# EAGLE board heehaw (EAGLE 9.0.1)
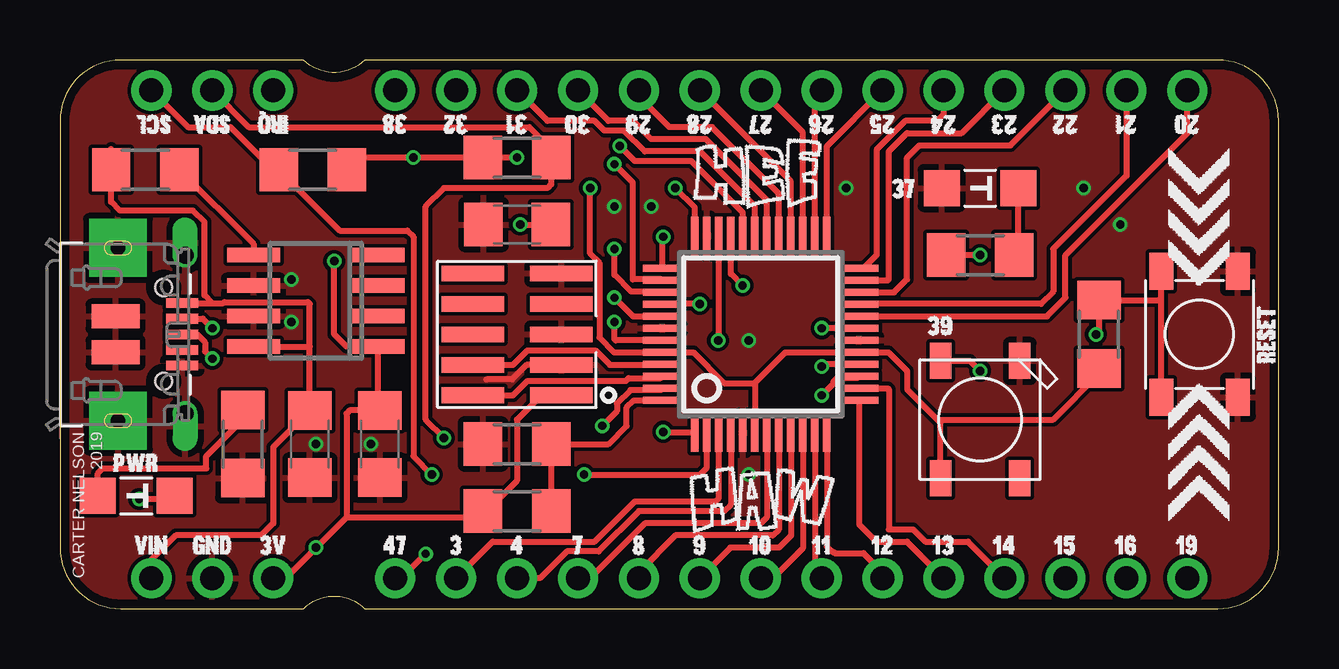
[diagram p0: board, top side]
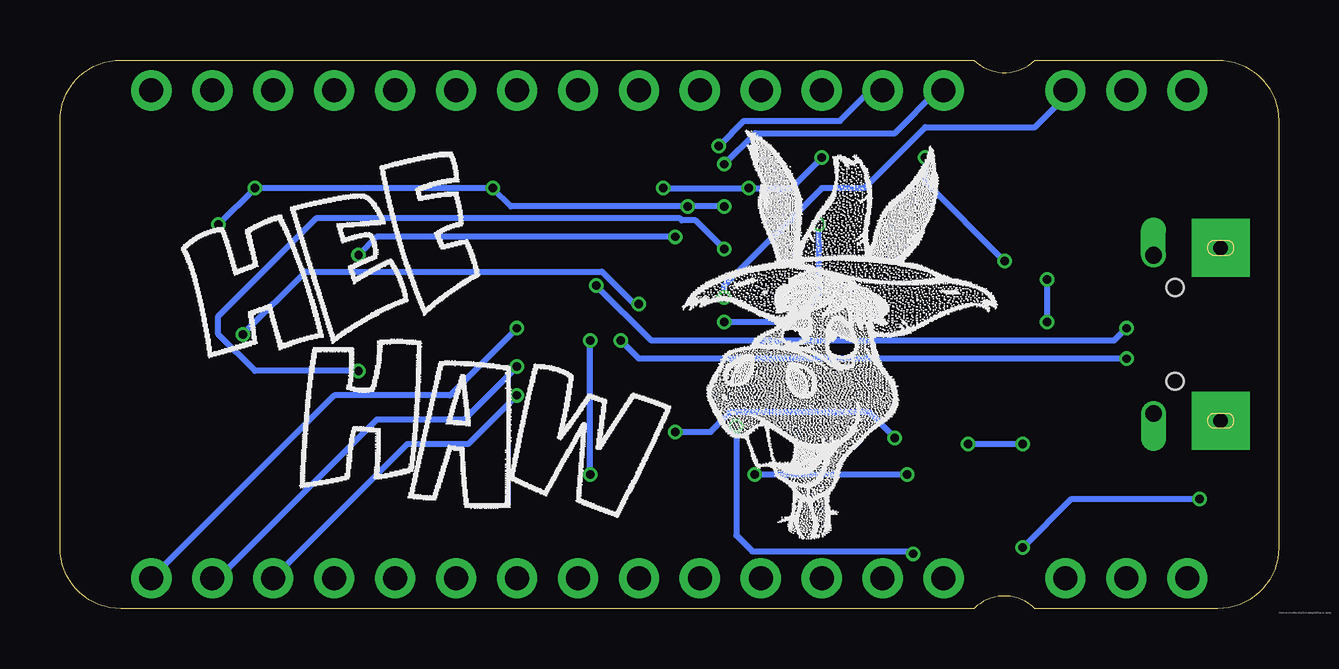
[diagram p1: board, bottom side, seen from below]

Size 50.8 x 22.86 mm. Coordinates in mm from the lower left corner, seen from the top.
Outline: 0,20.32 0,2.54 arc90 2.54,0 10.16,0 arc-90 12.7,0 48.26,0 arc90 50.8,2.54 50.8,20.32 arc90 48.26,22.86 12.7,22.86 arc-90 10.16,22.86 2.54,22.86 arc90 0,20.32
Copper layers (1*16): Top 0.035559375mm / dielectric 1.6mm / Bottom 0.035559375mm
Design rules "oshpark-2layer": minimum track width 6mil, minimum drill 10mil, track to track 6mil, track to pad 6mil, pad to pad 6mil, via to via 6mil, smd to smd 6mil, copper to edge 15mil, drill to drill 6mil, minimum pad ring 5mil, minimum via ring 5mil, stop-mask expansion 2.5mil, vias tented up to drill 0mil, thermal gap 10mil

## Footprints (pad centres in the part's own frame; a part is rotated, then mirrored left to right if it is on the bottom)
C1206 = smd 1.6 x 1.8: 1 -1.4,0; 2 1.4,0
LED1206 = smd 1.5 x 1.5: 1 -1.6,0; 2 1.6,0
R1206 = smd 1.6 x 1.803: 1 -1.422,0; 2 1.422,0
SO08 = smd 0.6 x 2.2: 1 -1.905,-2.6; 2 -0.635,-2.6; 3 0.635,-2.6; 4 1.905,-2.6; 5 1.905,2.6; 6 0.635,2.6; 7 -0.635,2.6; 8 -1.905,2.6
TQFP48_7MM = smd 0.3 x 1.6: 1 -2.75,-4.1; 2 -2.25,-4.1; 3 -1.75,-4.1; 4 -1.25,-4.1; 5 -0.75,-4.1; 6 -0.25,-4.1; 7 0.25,-4.1; 8 0.75,-4.1; 9 1.25,-4.1; 10 1.75,-4.1; 11 2.25,-4.1; 12 2.75,-4.1; 25 2.75,4.1; 26 2.25,4.1; 27 1.75,4.1; 28 1.25,4.1; 29 0.75,4.1; 30 0.25,4.1; 31 -0.25,4.1; 32 -0.75,4.1; 33 -1.25,4.1; 34 -1.75,4.1; 35 -2.25,4.1; 36 -2.75,4.1 | smd 1.6 x 0.3: 13 4.1,-2.75; 14 4.1,-2.25; 15 4.1,-1.75; 16 4.1,-1.25; 17 4.1,-0.75; 18 4.1,-0.25; 19 4.1,0.25; 20 4.1,0.75; 21 4.1,1.25; 22 4.1,1.75; 23 4.1,2.25; 24 4.1,2.75; 37 -4.1,2.75; 38 -4.1,2.25; 39 -4.1,1.75; 40 -4.1,1.25; 41 -4.1,0.75; 42 -4.1,0.25; 43 -4.1,-0.25; 44 -4.1,-0.75; 45 -4.1,-1.25; 46 -4.1,-1.75; 47 -4.1,-2.25; 48 -4.1,-2.75
PTS647 = smd 1.55 x 1: 1 -2.625,1.6; 2 2.625,1.6; 3 -2.625,-1.6; 4 2.625,-1.6
PHD_1X3 = drill 1 pad 1.676: 1 0,0; 2 2.54,0; 3 5.08,0
WS2812B_5050 = smd 1.5 x 0.9: 1-VDD 2.45,-1.65; 2-DOUT 2.45,1.65; 3-GND -2.45,1.65; 4-DIN -2.45,-1.65
PHD_1X14 = drill 1 pad 1.676: 1 0,0; 2 2.54,0; 3 5.08,0; 4 7.62,0; 5 10.16,0; 6 12.7,0; 7 15.24,0; 8 17.78,0; 9 20.32,0; 10 22.86,0; 11 25.4,0; 12 27.94,0; 13 30.48,0; 14 33.02,0
SWD_MINI = smd 0.65 x 2.6: 1 -2.54,-1.85; 2 -2.54,1.85; 3 -1.27,-1.85; 4 -1.27,1.85; 5 0,-1.85; 6 0,1.85; 7 1.27,-1.85; 8 1.27,1.85; 9 2.54,-1.85; 10 2.54,1.85
USB_MICRO_B = smd 1 x 2: BASE@1 -0.75,-2; BASE@2 0.75,-2 | smd 0.4 x 1.35: D+ 0,0.775; D- -0.65,0.775; GND 1.3,0.775; ID 0.65,0.775; VBUS -1.3,0.775 | drill 0.7 offset: SPRT@1 -3.3,0.9; SPRT@2 3.3,0.9 | drill 0.6 pad 2.413 square: SPRT@3 -3.6,-1.9; SPRT@4 3.6,-1.9 | hole 0.7: -1.95,0; 1.95,0

## Placement (x,y rotation side)
C1  1uF  [C1206]  19.05,16 180 top
C2  1uF  [C1206]  10.41,6.86 270 top
C3  1uF  [C1206]  13.34,6.86 270 top
D1  LED1206  [LED1206]  38.35,17.53 0 top
D3  LED1206  [LED1206]  3.17,4.7 0 top
R1  [R1206]  19.05,18.8 180 top
R2  [R1206]  10.54,18.29 0 top
R3  10K  [R1206]  3.56,18.29 180 top
R4  [R1206]  7.62,6.86 90 top
R5  [R1206]  43.31,11.43 270 top
R6  [R1206]  38.35,14.73 180 top
R7  [R1206]  19.05,4.06 180 top
R8  [R1206]  19.05,6.86 0 top
U2  AP2112-SO08  [SO08]  10.67,12.83 90 top
U$1  ATSAMD21G  [TQFP48_7MM]  29.21,11.43 0 top
U$2  PTS647  [PTS647]  47.5,11.43 270 top
U$10  PHD_1X3  [PHD_1X3]  3.81,1.27 0 top
U$11  PHD_1X3  [PHD_1X3]  8.89,21.59 180 top
U$20  NEOPIXEL_5050  [WS2812B_5050]  38.35,7.87 270 top
U$24  PHD_1X14  [PHD_1X14]  13.97,1.27 0 top
U$28  PHD_1X14  [PHD_1X14]  46.99,21.59 180 top
X1  [SWD_MINI]  19.05,11.43 90 top
X2  [USB_MICRO_B]  4.32,11.43 270 top

## Library data of the parts
C1-C3 = rcl; SPICEPREFIX: C
D1 D3 U$20 = Ooo-LED
R1 R2 R4-R8 = resistor
R3 = rcl; SPICEPREFIX: R
U2 = Ooo-IC-Power
U$1 = Ooo-IC-Microcontroller
U$2 = Ooo-Switches
U$10 U$11 U$24 U$28 X1 X2 = Ooo-Connectors

## Nets
3.3V: C3.1 D3.2 R1.2 R2.2 R5.2 R7.2 U2.1 U$1.6 U$1.17 U$1.36 U$1.44 U$10.3 U$20.1-VDD X1.1
!RESET: X1.10
D+: U$1.34 X2.D+
D-: U$1.33 X2.D-
GND: C1.2 C2.2 C3.2 D1.1 R4.1 R8.1 U2.6 U2.7 U$1.5 U$1.18 U$1.35 U$1.42 U$2.1 U$2.2 U$10.2 U$20.3-GND X1.3 X1.5 X1.9 X2.BASE@1 X2.BASE@2 X2.GND X2.SPRT@1 X2.SPRT@2 X2.SPRT@3 X2.SPRT@4
IRQ: U$1.41 U$11.1
N$1: D3.1 R4.2
N$2: R3.1 U2.5
N$5: R5.1 U$1.40 U$2.3 U$2.4
N$6: R6.2 U$1.37
N$7: D1.2 R6.1
N$8: R7.1 R8.2 U$1.48
N$9: C1.1 U$1.43
NEO: U$1.39 U$20.4-DIN
P3: U$1.3 U$24.2
P4: U$1.4 U$24.3
P7: U$1.7 U$24.4
P8: U$1.8 U$24.5
P9: U$1.9 U$24.6
P10: U$1.10 U$24.7
P11: U$1.11 U$24.8
P12: U$1.12 U$24.9
P13: U$1.13 U$24.10
P14: U$1.14 U$24.11
P15: U$1.15 U$24.12
P16: U$1.16 U$24.13
P19: U$1.19 U$24.14
P20: U$1.20 U$28.1
P21: U$1.21 U$28.2
P22: U$1.22 U$28.3
P23: U$1.23 U$28.4
P24: U$1.24 U$28.5
P25: U$1.25 U$28.6
P26: U$1.26 U$28.7
P27: U$1.27 U$28.8
P28: U$1.28 U$28.9
P29: U$1.29 U$28.10
P30: U$1.30 U$28.11
P31: U$1.31 U$28.12
P32: U$1.32 U$28.13
P38: U$1.38 U$28.14
P47: U$1.47 U$24.1
SCL: R2.1 U$1.2 U$11.3
SDA: R1.1 U$1.1 U$11.2
SWCLK: U$1.45 X1.4
SWDIO: U$1.46 X1.2
VIN: C2.1 R3.2 U2.8 U$10.1 X2.VBUS

## Tracks (layer width: path | path; a pad name or v marks a point on that pad's centre or on a via)
3.3V  (via drill 0.35)
  Top 0.254: 11.94,3.81 11.94,8.13 12.07,8.26 C3.1 13.27,8.32 U2.1 11.94,10.92 11.43,11.43 v11.43,14.48 | 11.94,3.81 v10.67,2.54 9.4,1.27 U$10.3 | 11.94,3.81 17.37,3.81 R7.2 17.78,4.06 19.05,5.33 19.05,7.87 20.07,8.89 X1.1 | 11.43,17.75 R2.2 12.47,18.8 v14.73,18.8 R1.2 v19.05,18.8 | 28.96,9.4 30.23,10.67 33.3,10.67 U$1.17 34.53,10.68 35.31,9.91 35.31,9.14 36.58,7.87 | 28.96,9.4 U$1.6 | 36.58,7.87 41.4,7.87 43.31,9.78 R5.2 | U$20.1-VDD 36.7,7.75 36.58,7.87 | v3.3,4.57 4.65,4.57 D3.2 | U$1.36 26.46,16.72 v25.65,17.53 | v22.1,17.53 22.1,14.79 22.48,14.41 22.48,11.3 23.1,10.68 U$1.44 26.4,10.68 27.69,9.4 28.96,9.4
  Bottom 0.254: v10.67,2.54 8.64,4.57 v3.3,4.57 | v25.65,17.53 v22.1,17.53 20.32,17.53 v19.05,18.8 | v11.43,14.48 14.73,17.78 v14.73,18.8
D+  (via drill 0.35)
  Top 0.254: v6.35,10.41 6.05,10.72 6.05,11.1 5.71,11.43 X2.D+ | v27.43,11.18 27.46,11.2 U$1.34
  Bottom 0.254: v6.35,10.41 26.67,10.41 v27.43,11.18
D-  (via drill 0.35)
  Top 0.254: X2.D- 5.95,12.08 v6.35,11.68 | v28.45,13.46 27.96,13.95 U$1.33
  Bottom 0.254: v28.45,13.46 26.16,11.18 6.86,11.18 v6.35,11.68
GND  (via drill 0.35)
  Top 0.254: X1.3 19.45,10.16 18.85,9.56 17.78,9.56
  Bottom 0.254: v44.2,16 v42.67,17.53 v32.77,17.53 32,16.76 v24.64,16.76 v23.11,16.76 | v28.7,5.59 v28.7,11.18 | v10.67,6.86 v12.95,6.86 | v9.65,11.94 v9.65,13.72
  pour Top: 0,0 0,22.86 50.8,22.86 50.8,0
IRQ  (via drill 0.35)
  Top 0.254: v23.11,12.95 23.89,12.18 U$1.41
  Bottom 0.254: v23.11,12.95 23.11,13.46 19.05,17.53 17.27,17.53 14.73,20.07 10.16,20.07 8.89,21.34 U$11.1
N$1
  Top 0.254: D3.1 1.57,5.64 1.78,5.84 6.1,5.84 6.1,6.35 7.62,7.87 R4.2
N$2
  Top 0.254: R3.1 8.07,15.2 U2.5
N$5  (via drill 0.35)
  Top 0.254: U$2.4 45.9,12.95 | 45.9,12.95 U$2.3 | 45.9,12.95 45.8,12.85 R5.1 43.31,11.56 v43.18,11.43 | v26.67,12.7 25.13,12.7 U$1.40 25.09,12.7
  Bottom 0.254: v26.67,12.7 26.86,12.7 28.21,14.04 40.57,14.04 v43.18,11.43
N$6  (via drill 0.35)
  Top 0.254: U$1.37 25.11,15.46 v25.15,15.49 | v38.35,14.73 R6.2
  Bottom 0.254: v25.15,15.49 37.59,15.49 v38.35,14.73
N$7
  Top 0.254: R6.1 39.95,14.91 D1.2
N$8
  Top 0.254: R7.1 R8.2 22.86,6.86 23.62,7.62 23.62,8.38 23.92,8.68 U$1.48
N$9  (via drill 0.35)
  Top 0.254: v19.18,16 C1.1 | U$1.43 23.18,11.18 23.11,11.24 v23.11,11.94
  Bottom 0.254: v19.18,16 19.18,13.08 20.32,11.94 v23.11,11.94
NEO  (via drill 0.35)
  Top 0.254: U$20.4-DIN 37.94,10.32 v38.35,9.91 | U$1.39 25.08,13.21 23.81,13.21 23.11,13.9 v23.11,14.99
  Bottom 0.254: v38.35,9.91 42.67,9.91 44.2,11.43 44.2,12.19 40.13,16.26 24.95,16.26 24.88,16.18 24.31,16.18 v23.11,14.99
P3
  Top 0.254: U$24.2 18.03,2.79 22.29,2.79 23.96,4.47 27.33,4.47 27.46,4.6 27.46,6.49 27.46,7.11 U$1.3
P4
  Top 0.254: U$1.4 27.96,4.34 27.69,4.06 24.13,4.06 22.45,2.39 21.13,2.39 20.01,1.27 U$24.3
P7
  Top 0.254: U$1.7 29.46,3.81 29.21,3.56 24.38,3.56 22.1,1.27 U$24.4
P8
  Top 0.254: U$1.8 29.96,3.29 29.72,3.05 25.65,3.05 24.13,1.52 U$24.5
P9
  Top 0.254: U$1.9 30.46,3.07 30.48,3.05 29.97,2.54 27.94,2.54 U$24.6
P10
  Top 0.254: U$1.10 30.96,2.51 29.72,1.27 U$24.7
P11
  Top 0.254: U$1.11 31.46,1.56 U$24.8
P12
  Top 0.254: U$1.12 31.96,2.58 32.16,2.39 32.21,2.39 32.29,2.31 33.5,2.31 34.29,1.52 U$24.9
P13
  Top 0.254: U$1.13 33.31,3.52 34.04,2.79 35.31,2.79 U$24.10
P14
  Top 0.254: U$1.14 34.51,9.18 34.54,9.14 34.54,3.3 35.56,3.3 36.07,2.79 37.85,2.79 U$24.11
P15  (via drill 0.35)
  Top 0.254: U$1.15 33.24,9.61 32.39,9.61 32.23,9.45 32.23,9.37 v31.75,8.89
  Bottom 0.254: v31.75,8.89 33.78,6.86 36.32,6.86 U$24.12
P16  (via drill 0.35)
  Top 0.254: U$1.16 31.84,10.18 v31.75,10.09
  Bottom 0.254: v31.75,10.09 33.96,7.87 37.59,7.87 44.2,1.27 U$24.13
P19  (via drill 0.35)
  Top 0.254: U$1.19 v31.75,11.68
  Bottom 0.254: v31.75,11.68 34.54,8.89 39.37,8.89 U$24.14
P20
  Top 0.254: U$1.20 41.14,12.18 41.91,12.95 41.91,14.73 46.99,19.81 U$28.1
P21
  Top 0.254: U$28.2 44.45,18.03 41.4,14.99 41.4,13.21 40.89,12.7 33.33,12.7 U$1.21
P22
  Top 0.254: U$1.22 34.77,13.18 35.31,13.72 35.31,18.8 35.81,19.3 39.62,19.3 U$28.3
P23
  Top 0.254: U$1.23 34.51,13.68 34.54,13.72 34.54,19.05 35.31,19.81 37.59,19.81 U$28.4
P24
  Top 0.254: U$28.5 36.83,20.57 36.58,20.32 35.24,20.32 34.04,19.12 34.04,14.73 33.48,14.18 U$1.24
P25
  Top 0.254: U$1.25 31.96,19.26 U$28.6
P26
  Top 0.254: U$1.26 31.46,21.3 U$28.7
P27
  Top 0.254: U$1.27 30.96,19.84 U$28.8
P28
  Top 0.254: U$1.28 30.46,17.8 U$28.9
P29
  Top 0.254: U$1.29 29.96,17.28 27.18,20.07 25.4,20.07 24.13,21.34 U$28.10
P30
  Top 0.254: U$1.30 29.46,17.01 29.46,17.02 26.92,19.56 24.64,19.56 23.88,20.32 22.86,20.32 U$28.11
P31
  Top 0.254: U$1.31 28.96,16.76 26.67,19.05 24.38,19.05 23.52,19.91 22.69,19.91 22.29,20.32 20.32,20.32 U$28.12
P32  (via drill 0.35)
  Top 0.254: U$1.32 28.46,16.5 26.31,18.64 23.97,18.64 v23.34,19.27
  Bottom 0.254: v23.34,19.27 22.29,20.32 18.29,20.32 17.02,21.59 U$28.13
P38  (via drill 0.35)
  Top 0.254: U$1.38 25.07,13.72 23.88,13.72 23.88,17.75 v23.11,18.52
  Bottom 0.254: v23.11,18.52 21.82,19.81 16,19.81 14.22,21.59 U$28.14
P47  (via drill 0.35)
  Top 0.254: U$1.47 25.04,9.11 23.77,9.11 23.22,8.55 23.22,8.23 v22.61,7.62 | v15.24,2.29 14.22,1.27 U$24.1
  Bottom 0.254: v22.61,7.62 22.61,3.05 21.95,2.39 15.34,2.39 v15.24,2.29
SCL  (via drill 0.35)
  Top 0.254: U$11.3 5.33,20.07 7.11,20.07 8.89,18.29 R2.1 11.66,15.75 14.48,15.75 14.73,15.49 14.73,6.35 v15.49,5.59 | U$1.2 26.96,5.88 26.67,5.59 v21.84,5.59
  Bottom 0.254: v15.49,5.59 v21.84,5.59
SDA  (via drill 0.35)
  Top 0.254: U$11.2 7.87,20.07 19.56,20.07 20.47,19.15 R1.1 20.47,17.68 20.32,17.53 16,17.53 15.24,16.76 15.24,7.87 v16,7.11 | U$1.1 25.18,7.33 v25.15,7.37
  Bottom 0.254: v25.15,7.37 23.68,7.37 22.85,8.2 17.09,8.2 v16,7.11
SWCLK
  Top 0.254: U$1.45 25.09,10.16 22.92,10.16 22.32,10.76 19.48,10.76 18.88,10.16 X1.4
SWDIO
  Top 0.254: X1.2 18.88,8.89 19.48,9.49 23.59,9.49 23.7,9.61 25.04,9.61 U$1.46
VIN
  Top 0.254: 10.41,10.92 C2.1 8.89,6.73 8.89,3.56 8.38,3.05 4.83,3.05 3.81,2.03 U$10.1 | 10.41,10.92 10.41,12.7 10.34,12.77 6.85,12.77 6.81,12.73 6.35,12.73 | 2.13,19.15 R3.2 2.13,16.95 2.5,16.58 5.55,16.58 6.02,16.11 6.02,13.06 6.35,12.73 | U2.8 10.41,10.92 | X2.VBUS 6.35,12.73

## Text on the board
tPlace: CARTER NELSON / 2019
bPlace: /home/methuzla/Desktop/bPlace.bmp